# Altium PCB auto_turn.PcbDoc
Units mil, origin at the board's own origin, x right, y up, seen from the top; angles counter-clockwise.
Board outline 3937.01 x 2362.2 mil, 2 copper layers (Top Layer, Bottom Layer); 127 components, 77 nets, 409 pads, 81 vias.
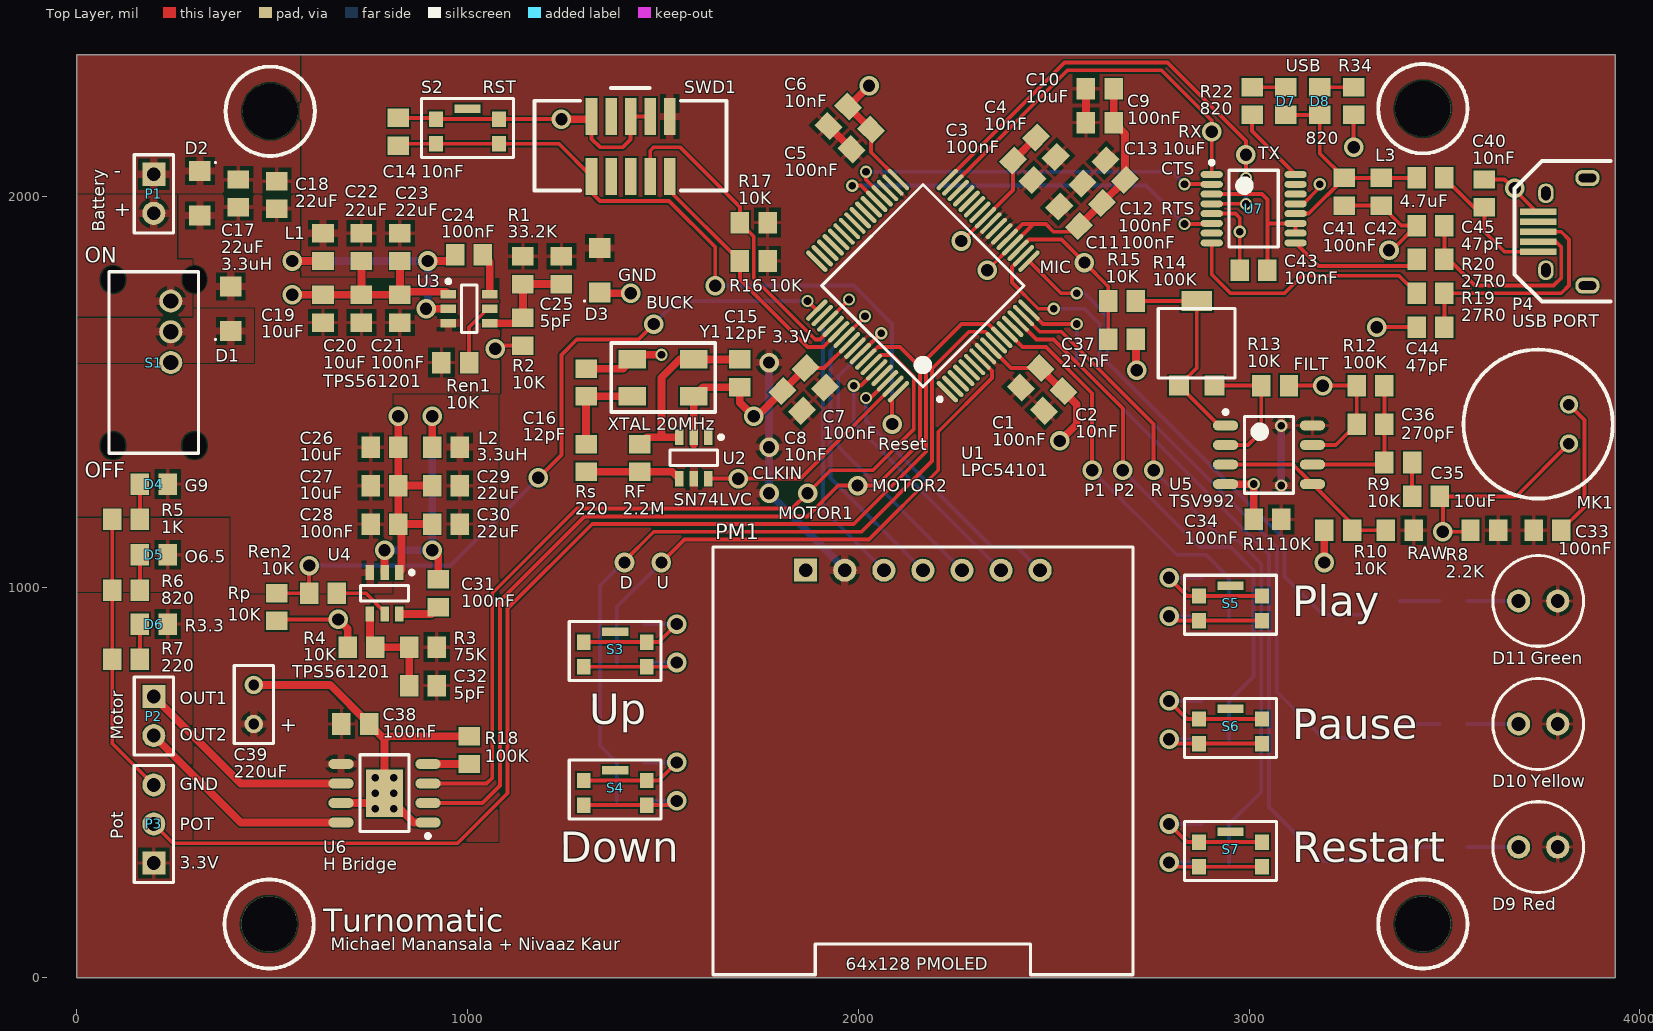
[diagram p0: Top Layer view]
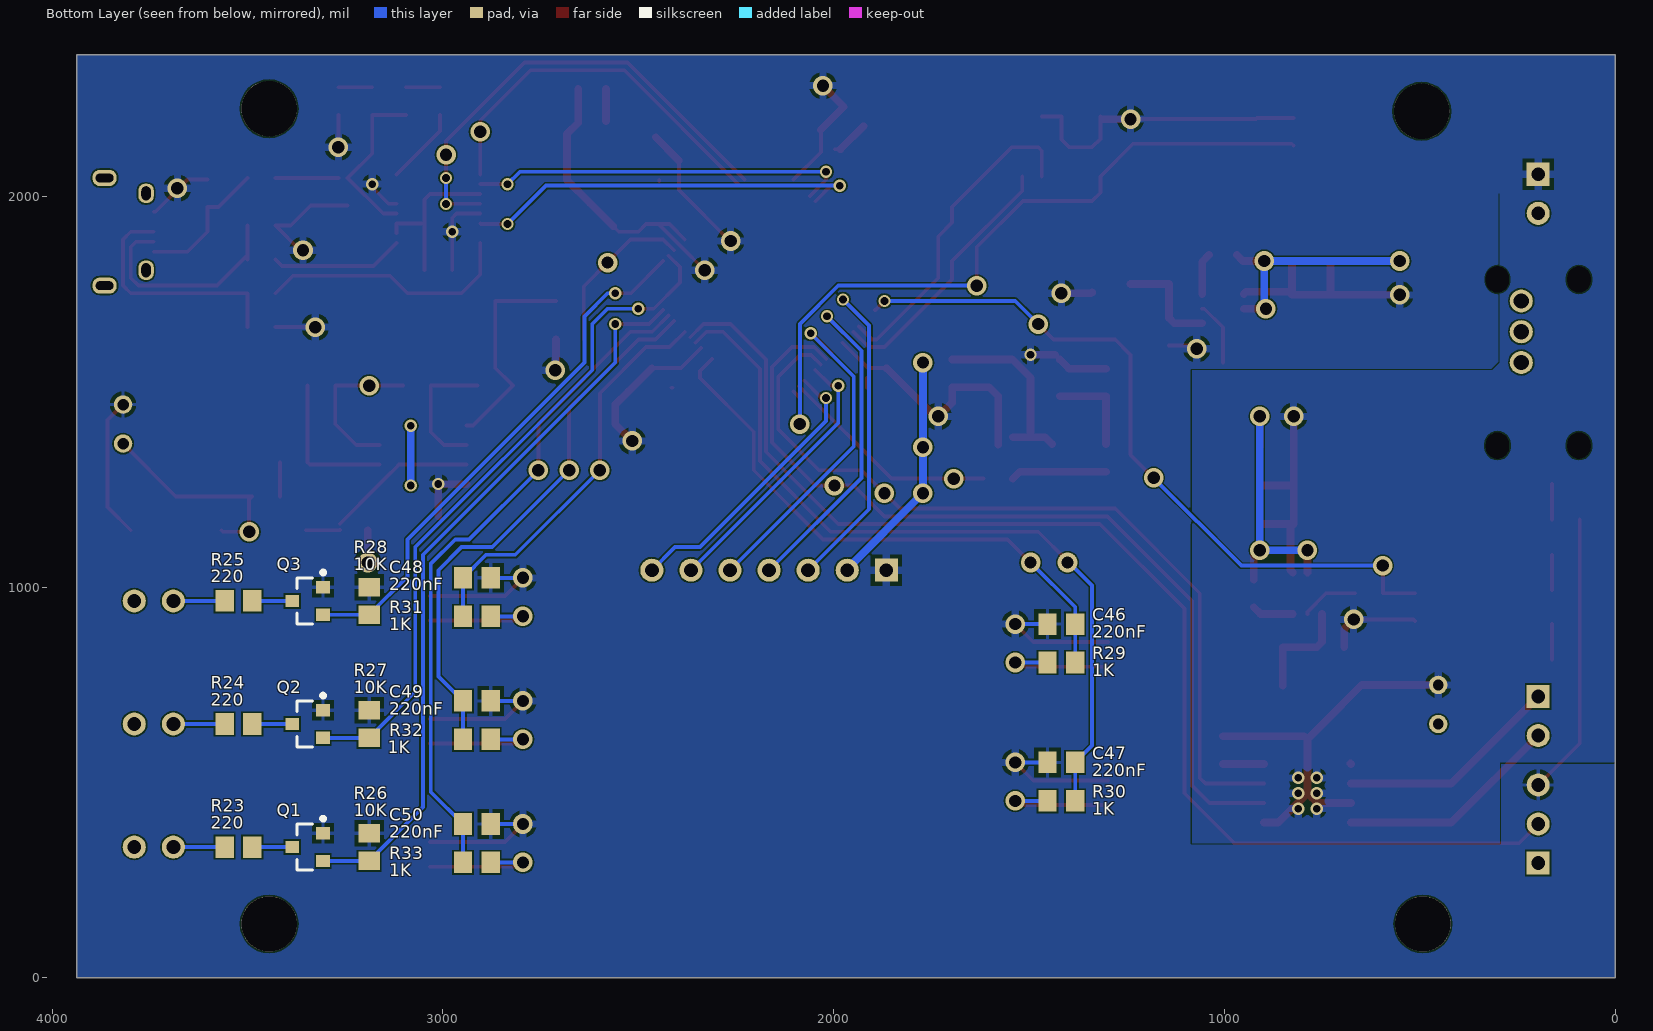
[diagram p1: Bottom Layer view, seen from below]
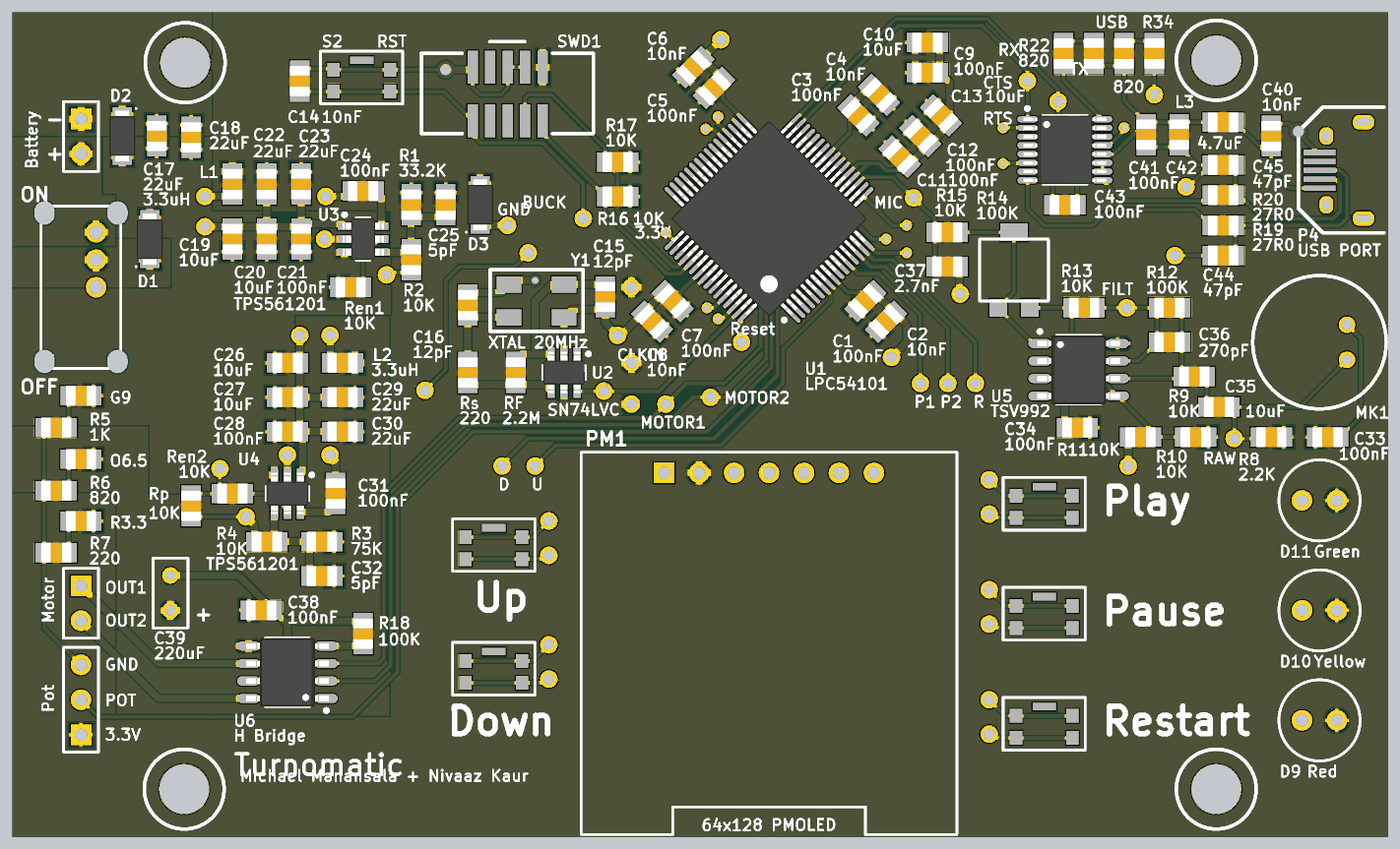
[diagram p2: 3D render of the assembled board from above, using the file's embedded part models]
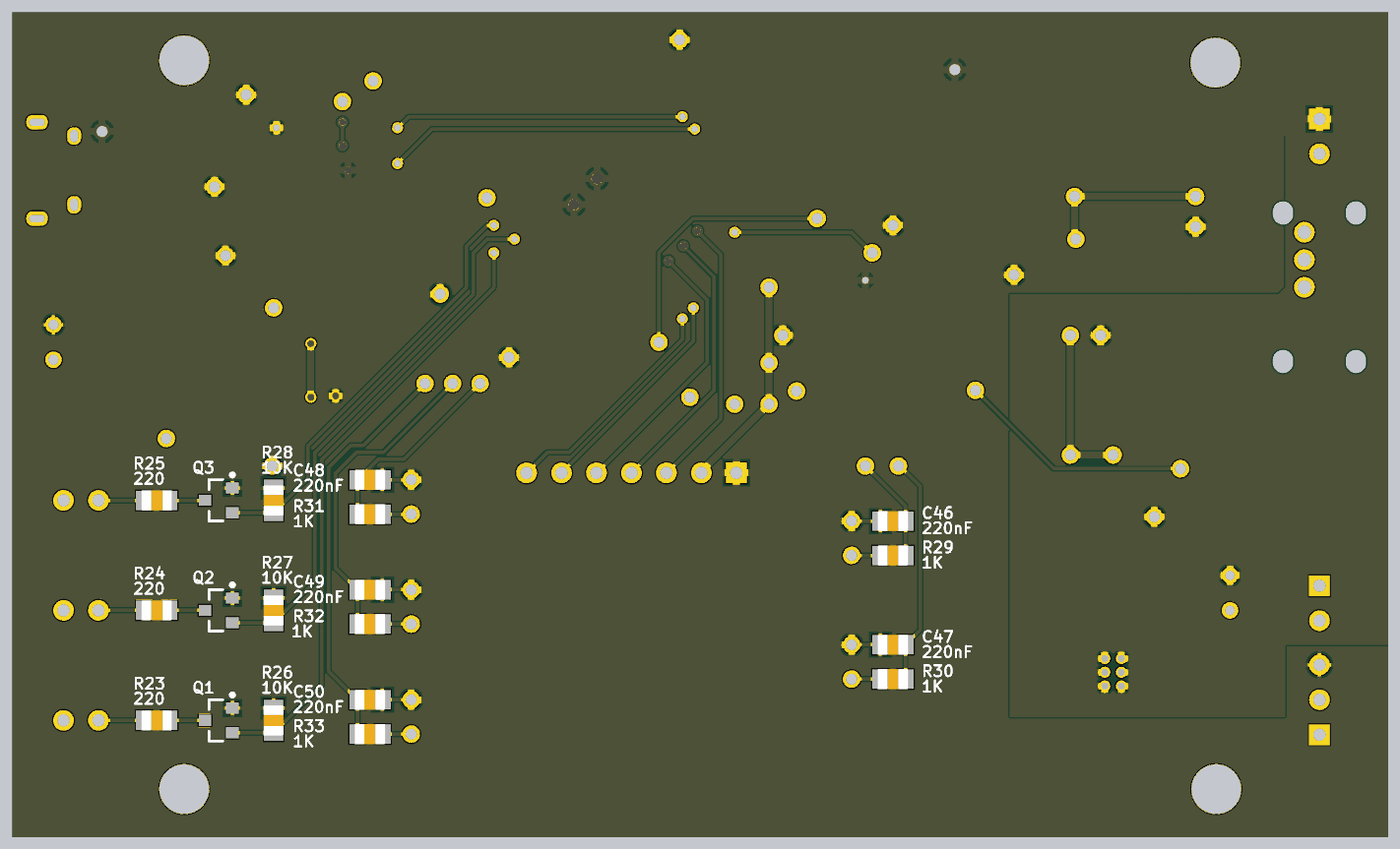
[diagram p3: 3D render of the assembled board from below, using the file's embedded part models]

## Layer stack, top to bottom
Top Solder: solder mask 0.4, Solder Resist, Dk 3.5
Top Layer: signal copper 1.4
Dielectric 1: dielectric 12.6, FR-4, Dk 4.8
Bottom Layer: signal copper 1.4
Bottom Solder: solder mask 0.4, Solder Resist, Dk 3.5

## Board outline
0,0 3937.01,0 3937.01,2362.2 0,2362.2

## Design rules (kind name [scope] priority, off if disabled: settings)
Clearance [All] p1: gap=3.94
HoleSize [All] p1: absolutevalues=TRUE maxlimit=196.85 minlimit=1 maxpercent=80.000 minpercent=20.000
MinimumSolderMaskSliver [All] p1: minsoldermaskwidth=0.2
PolygonConnect PolygonConnect_Power [HasFootprint('HDR1X2') OR HasFootprint('SOIC-8 PP') OR HasFootprint('DO219AB') OR HasFootprint('SOT236') OR InComponent('L*') OR HasFootprint('RAD-0.1') OR HasFootprint('MFS101D-8-Z') OR HasFootprint('ARM SWD connector') OR HasFootprint('PMOLED 128x64') or IsVia] p1: connectstyle=Relief reliefconductorwidth=19.68 reliefentries=4 polygonreliefangle="90 Angle" airgapwidth=9.84
PolygonConnect [All] p2: connectstyle=Relief reliefconductorwidth=9.84 reliefentries=4 polygonreliefangle="90 Angle" airgapwidth=9.84
RoomDefinition auto_turn [InComponentClass('auto_turn')] p1: confinementstyle=ConfineIn formatcopy=TRUE lockcomponents=FALSE outline 0,0 3937.01,0 3937.01,2362.2 0,2362.2
RoutingVias [All] p1: holewidth=31.5 width=50 viastyle="Through Hole" minholewidth=19.68 minwidth=31.5 maxholewidth=31.5 maxwidth=50
SilkToSilkClearance [All] p1: silktosilkclearance=3.94
SilkToSolderMaskClearance [IsPad] p1: minsilkscreentomaskgap=3.94 clearancetoexposedcopper=TRUE
SolderMaskExpansion [All] p1: expansion=4
Width Width_Power [InNet('GND') OR InNet('V3.3') OR InNet('V6.5') OR InNet('VIN') OR InNet('NetP1_2') OR InNet('NetD1_1')] p1: maxlimit=39.37 minlimit=9.84 preferedwidth=19.68
Width [All] p2: maxlimit=19.68 minlimit=9.84 preferedwidth=9.84
26 further rules are at their usual default settings.

## Components (designator, comment, footprint, x,y, rotation, side; value= is the part's Value field where it differs from the comment)
C1 "100nF" "0805 MD" 2440.94,1535.43 r225 top
C2 "10nF" "0805 MD" 2500,1476.38 r225 top
C3 "100nF" "0805 MD" 2421.26,2066.93 r315 top
C4 "10nF" "0805 MD" 2480.31,2125.98 r315 top
C5 "100nF" "0805 MD" 2007.87,2145.67 r225 top
C6 "10nF" "0805 MD" 1948.82,2204.72 r225 top
C7 "100nF" "0805 MD" 1889.76,1535.43 r315 top
C8 "10nF" "0805 MD" 1830.71,1476.38 r315 top
C9 "100nF" "0805 MD" 2618.11,2188.98 r180 top
C10 "10uF" "0805 MD" 2618.11,2275.59 r180 top
C11 "100nF" "0805 MD" 2539.37,1948.82 r135 top
C12 "100nF" "0805 MD" 2598.43,2007.87 r135 top
C13 "10uF" "0805 MD" 2657.48,2066.93 r135 top
C14 "10nF" "0805 MD" 822.83,2165.35 r270 top
C15 "12pF" "0805 MD" 1696.85,1547.24 r90 top
C16 "12pF" "0805 MD" 1303.15,1523.62 r270 top
C17 "22uF" "0805 MD" 413.39,2007.87 r270 top
C18 "22uF" "0805 MD" 511.81,2003.94 r270 top
C19 "10uF" "0805 MD" 629.92,1712.6 r270 top
C20 "10uF" "0805 MD" 728.35,1712.6 r270 top
C21 "100nF" "0805 MD" 826.77,1712.6 r270 top
C22 "22uF" "0805 MD" 728.35,1870.08 r90 top
C23 "22uF" "0805 MD" 826.77,1870.08 r90 top
C24 "100nF" "0805 MD" 1003.94,1850.39 r180 top
C25 "5pF" "0805 MD" 1240.16,1811.02 r270 top
C26 "10uF" "0805 MD" 787.4,1358.27 r180 top
C27 "10uF" "0805 MD" 787.4,1259.84 r180 top
C28 "100nF" "0805 MD" 787.4,1161.42 r180 top
C29 "22uF" "0805 MD" 944.88,1259.84 r0 top
C30 "22uF" "0805 MD" 944.88,1161.42 r0 top
C31 "100nF" "0805 MD" 925.2,984.25 r90 top
C32 "5pF" "0805 MD" 885.83,748.03 r180 top
C33 "100nF" "0805 MD" 3763.78,1145.67 r180 top
C34 "100nF" "0805 MD" 3047.24,1173.23 r0 top
C35 "10uF" "0805 MD" 3452.76,1232.28 r0 top
C36 "270pF" "0805 MD" 3311.02,1417.32 r0 top
C37 "2.7nF" "0805 MD" 2675.2,1633.86 r180 top
C38 "100nF" "0805 MD" 712.6,649.61 r180 top
C39 "220uF" RAD-0.1 452.76,699.61 r270 top
C40 "10nF" "0805 MD" 3602.36,2007.87 r270 top
C41 "100nF" "0805 MD" 3244.09,2011.81 r90 top
C42 "4.7uF" "0805 MD" 3338.58,2011.81 r90 top
C43 "100nF" "0805 MD" 3011.81,1811.02 r0 top
C44 "47pF" "0805 MD" 3464.57,1665.35 r0 top
C45 "47pF" "0805 MD" 3464.57,1925.2 r0 top
C46 "220nF" "0805 MD" 1417.32,905.51 r180 bottom
C47 "220nF" "0805 MD" 1417.32,551.18 r180 bottom
C48 "220nF" "0805 MD" 2913.39,1023.62 r0 bottom
C49 "220nF" "0805 MD" 2913.39,708.66 r0 bottom
C50 "220nF" "0805 MD" 2913.39,393.7 r0 bottom
D1 "D Schottky 0.4V" DO219AB 393.7,1712.6 r90 top
D2 "D Zener 16V" DO219AB 314.96,2007.87 r270 top
D3 "D Zener 3.9V" DO219AB 1338.58,1811.02 r90 top
D4 "G9" "0805 MD" 196.85,1263.78 r180 top
D5 "O6.5" "0805 MD" 196.85,1082.68 r180 top
D6 "R3.3" "0805 MD" 196.85,905.51 r180 top
D7 "Transfer" "0805 MD" 3094.49,2244.09 r90 top
D8 "USB" "0805 MD" 3181.1,2244.09 r90 top
D9 "Red" "5mm LED" 3740.16,334.65 r180 top
D10 "Yellow" "5mm LED" 3740.16,649.61 r180 top
D11 "Green" "5mm LED" 3740.16,964.57 r180 top
L1 "3.3uH" "0805 MD" 629.92,1870.08 r270 top
L2 "3.3uH" "0805 MD" 944.88,1358.27 r180 top
L3 "Ferrite Bead" "0805 MD" 3464.57,2047.24 r180 top
MK1 "Mic" CMA-4544PF-W 3740.16,1417.32 r0 top
P1 "Battery" HDR1X2 196.85,2056.69 r270 top
P2 "Motor" HDR1X2 196.85,720.08 r270 top
P3 "Pot" HDR1X3 196.85,293.7 r90 top
P4 "USB PORT" "USB Micro B" 3759.84,1960.63 r90 top
PM1 "64x128 PMOLED" "PMOLED 128x64" 2165.35,1043.31 r0 top
Q1 "MOSFET-N" SOT23 3346.46,334.65 r0 bottom
Q2 "MOSFET-N" SOT23 3346.46,649.61 r0 bottom
Q3 "MOSFET-N" SOT23 3346.46,964.57 r0 bottom
R1 "33.2K" "0805 MD" 1141.73,1811.02 r90 top
R2 "10K" "0805 MD" 1141.73,1653.54 r90 top
R3 "75K" "0805 MD" 885.83,846.46 r0 top
R4 "10K" "0805 MD" 728.35,846.46 r0 top
R5 "1K" "0805 MD" 125.98,1173.23 r180 top
R6 "820" "0805 MD" 125.98,992.13 r0 top
R7 "220" "0805 MD" 125.98,814.96 r0 top
R8 "2.2K" "0805 MD" 3602.36,1145.67 r0 top
R9 "10K" "0805 MD" 3381.89,1318.9 r180 top
R10 "10K" "0805 MD" 3385.83,1145.67 r0 top
R11 "10K" "0805 MD" 3228.35,1145.67 r0 top
R12 "100K" "0805 MD" 3311.02,1515.75 r180 top
R13 "10K" "0805 MD" 3066.93,1515.75 r180 top
R14 "100K" "Trimmer 23B" 2866.14,1624.02 r270 top
R15 "10K" "0805 MD" 2675.2,1732.28 r180 top
R16 "10K" "0805 MD" 1732.28,1834.65 r0 top
R17 "10K" "0805 MD" 1732.28,1933.07 r0 top
R18 "100K" "0805 MD" 1003.94,582.68 r270 top
R19 "27R0" "0805 MD" 3464.57,1751.97 r0 top
R20 "27R0" "0805 MD" 3464.57,1838.58 r0 top
R22 "820" "0805 MD" 3007.87,2244.09 r270 top
R23 "220" "0805 MD" 3523.62,334.65 r0 bottom
R24 "220" "0805 MD" 3523.62,649.61 r0 bottom
R25 "220" "0805 MD" 3523.62,964.57 r0 bottom
R26 "10K" "0805 MD" 3188.98,334.65 r270 bottom
R27 "10K" "0805 MD" 3188.98,649.61 r270 bottom
R28 "10K" "0805 MD" 3188.98,964.57 r270 bottom
R29 "1K" "0805 MD" 1417.32,807.09 r0 bottom
R30 "1K" "0805 MD" 1417.32,452.76 r0 bottom
R31 "1K" "0805 MD" 2913.39,925.2 r180 bottom
R32 "1K" "0805 MD" 2913.39,610.24 r180 bottom
R33 "1K" "0805 MD" 2913.39,295.28 r180 bottom
R34 "820" "0805 MD" 3267.72,2244.09 r90 top
Ren1 "10K" "0805 MD" 968.5,1574.8 r180 top
Ren2 "10K" "0805 MD" 629.92,984.25 r180 top
RF "2.2M" "0805 MD" 1440.94,1330.71 r270 top
Rp "10K" "0805 MD" 511.81,948.82 r90 top
Rs "220" "0805 MD" 1303.15,1330.71 r270 top
S1 "SW-SPDT" MFS101D-8-Z 196.85,1574.8 r270 top
S2 "RST" "Pushbutton KMR2" 919.29,2134.84 r0 top
S3 "Up" "Pushbutton KMR2" 1297.24,796.26 r0 top
S4 "Down" "Pushbutton KMR2" 1297.24,441.93 r0 top
S5 "Play" "Pushbutton KMR2" 2872.05,914.37 r0 top
S6 "Pause" "Pushbutton KMR2" 2872.05,599.41 r0 top
S7 "Restart" "Pushbutton KMR2" 2872.05,284.45 r0 top
SWD1 "Debug connector" "ARM SWD connector" 1517.32,2204.72 r180 top
U1 "LPC54101" LQFP64 2165.35,1771.65 r135 top
U2 "SN74LVC" SOT236 1578.74,1330.71 r270 top
U3 "TPS561201" SOT236 1003.94,1712.6 r0 top
U4 "TPS561201" SOT236 787.4,984.25 r270 top
U5 "TSV992" SOIC-8 3051.18,1338.58 r0 top
U6 "H Bridge" "SOIC-8 PP" 787.4,472.44 r180 top
U7 "FT230X" "SSOP-16 FTDI" 3011.81,1968.5 r0 top
Y1 "XTAL 20MHz" "SMD XTAL 4Pin" 1578.74,1488.19 r180 top

## Footprints (in the part's own frame and the unit in brackets; to place one, negate y for a bottom-side part, rotate by r counter-clockwise, add the part's x,y. Pads: shape width x height; smd on the part's side, far side on the other; paste and mask are expansions set on the pad)
"5mm LED" [mm] "5mm LED"
  round 1.5 hole 0.9: 1(-1.27,0) 2(1.27,0)
  silkscreen extent -2.95,-2.95 2.95,2.95
"0805 MD" [mm] "0805 imperial Capacitor medium density"
  rect 1.2x1.4 smd: 1(-0.9,0) 2(0.9,0)
  body extent -1.11,-0.73 1.11,0.73, height 1.4
"ARM SWD connector" [mm] "1.27mm pitch, 10 poles, 2 rows, SMD"
  rect 0.76x2.4 smd: 1(0,0) 2(0,3.9) 3(1.27,0) 4(1.27,3.9) 5(2.54,0) 6(2.54,3.9) 7(3.81,0) 8(3.81,3.9) 9(5.08,0) 10(5.08,3.9)
  silkscreen extent -3.68,-1.85 8.8,4.83
CMA-4544PF-W [mm] "Electret Condensor Microphone"
  round 1.2 hole 0.75: 1(2,1.27) 2(2,-1.27)
  silkscreen extent -4.85,-4.85 4.85,4.85
DO219AB [mm] "SODFL, 2-Leads, Body 1.80x3.70mm, IPC Medium Density"
  rect 1.3x1.4 smd: 1(-1.45,0) 2(1.45,0)
  silkscreen extent -2.05,0.95 -1.95,1.05, body extent -1.85,-0.95 1.85,0.95, height 1.08
HDR1X2 [mm] "Connector; Header; 2 Position"
  rect 1.5x1.5 hole 0.9: 1(0,0)
  round 1.5 hole 0.9: 2(2.54,0)
  silkscreen extent -1.27,-1.27 3.81,1.27
HDR1X3 [mm] "Connector; Header; 3 Position"
  rect 1.5x1.5 hole 0.9: 1(0,0)
  round 1.5 hole 0.9: 2(2.54,0) 3(5.08,0)
  silkscreen extent -1.27,-1.27 6.35,1.27
LQFP64 [mm] "LQFP64 from NXP datasheet long lead"
  oval 1.85x0.29 smd: 1(-6,3.75) 2(-6,3.25) 3(-6,2.75) 4(-6,2.25) 5(-6,1.75) 6(-6,1.25) 7(-6,0.75) 8(-6,0.25) 9(-6,-0.25) 10(-6,-0.75) 11(-6,-1.25) 12(-6,-1.75) 13(-6,-2.25) 14(-6,-2.75) 15(-6,-3.25) 16(-6,-3.75) 33(6,-3.75) 34(6,-3.25) 35(6,-2.75) 36(6,-2.25) 37(6,-1.75) 38(6,-1.25) 39(6,-0.75) 40(6,-0.25) 41(6,0.25) 42(6,0.75) 43(6,1.25) 44(6,1.75) 45(6,2.25) 46(6,2.75) 47(6,3.25) 48(6,3.75)
  oval 0.29x1.85 smd: 17(-3.75,-6) 18(-3.25,-6) 19(-2.75,-6) 20(-2.25,-6) 21(-1.75,-6) 22(-1.25,-6) 23(-0.75,-6) 24(-0.25,-6) 25(0.25,-6) 26(0.75,-6) 27(1.25,-6) 28(1.75,-6) 29(2.25,-6) 30(2.75,-6) 31(3.25,-6) 32(3.75,-6) 49(3.75,6) 50(3.25,6) 51(2.75,6) 52(2.25,6) 53(1.75,6) 54(1.25,6) 55(0.75,6) 56(0.25,6) 57(-0.25,6) 58(-0.75,6) 59(-1.25,6) 60(-1.75,6) 61(-2.25,6) 62(-2.75,6) 63(-3.25,6) 64(-3.75,6)
  silkscreen extent -6.12,-4.65 4.65,4.65, body extent -6.08,-6.08 6.08,6.08, height 1.6
MFS101D-8-Z [mm] "Copal Electronics Inc. MFS101D-8-Z"
  round 1.5 hole 1: 1(-4,1.1) 2(-2,1.1) 3(0,1.1)
  round 0 hole 1.5 slot 1.7 at 0 deg unplated: H(-5.4,2.65) H(-5.4,-2.65) H(5.4,2.65) H(5.4,-2.65)
  silkscreen extent -5.9,-2.9 5.9,2.9
"PMOLED 128x64" [mm] "128x64 PMOLED"
  rect 1.5x1.5 hole 0.9: 1(-7.62,0)
  round 1.5 hole 0.9: 2(-5.08,0) 3(-2.54,0) 4(0,0) 5(2.54,0) 6(5.08,0) 7(7.62,0)
  silkscreen extent -13.65,-26.3 13.65,1.5
"Pushbutton KMR2" [mm] "KMR 2 micro switch"
  rect 0.9x1 smd: 1(0,1.6) 1(4.1,1.6) 2(0,0) 2(4.1,0)
  rect 1.7x0.55 smd: G(2.05,2.275)
  silkscreen extent -0.94,-0.89 5.03,2.95
RAD-0.1 [mm] "Radial Cap, Thru-Hole; 2 Leads; 0.1 in Pin Spacing"
  round 1.2 hole 0.7: 1(-1.27,0) 2(1.27,0)
  silkscreen extent -2.54,-1.27 2.54,1.27
"SMD XTAL 4Pin" [mm] "Abracon AB3MB SMD XTAL 4 pin"
  rect 1.8x1.2 smd: 1(0,-2.4) 2(4,-2.4) 3(4,0) 4(0,0)
  silkscreen extent -1.4,-3.48 5.36,1.02
SOIC-8 [mm] "SOIC-8 from TI datasheet"
  oval 1.65x0.65 smd: 1(-2.825,1.905) 2(-2.825,0.635) 3(-2.825,-0.635) 4(-2.825,-1.905) 5(2.825,-1.905) 6(2.825,-0.635) 7(2.825,0.635) 8(2.825,1.905)
  silkscreen extent -2.95,-2.5 1.6,2.9, body extent -3,-2.5 3,2.5, height 2.65
"SOIC-8 PP" [mm] "SOIC-8 with power pad from TI datasheet"
  oval 1.65x0.65 smd: 1(-2.825,1.905) 2(-2.825,0.635) 3(-2.825,-0.635) 4(-2.825,-1.905) 5(2.825,-1.905) 6(2.825,-0.635) 7(2.825,0.635) 8(2.825,1.905)
  rect 2.4x3.1 smd: 9(0,0)
  silkscreen extent -2.95,-2.5 1.6,2.9, body extent -3,-2.5 3,2.5, height 2.65
SOT23 [mm] "SOT23, 3-Leads, Body 2.90x2.40mm, Pitch 0.90mm, IPC Medium Density"
  rect 0.9x0.8 smd: 1(1,0) 2(-1,0.9) 3(-1,-0.9)
  silkscreen extent -1.12,-1.97 0.7,1.5, body extent -0.7,-1.5 0.7,1.5, height 1.1
SOT236 [mm] "SOT23, 6-Leads, Body 2.90x2.80mm, Pitch 0.95mm, IPC Medium Density"
  rect 1x0.55 smd: 1(-1.35,0.95) 2(-1.35,0) 3(-1.35,-0.95) 4(1.35,-0.95) 5(1.35,0) 6(1.35,0.95)
  silkscreen extent -1.47,-1.55 0.5,1.9, body extent -1.5,-1.53 1.5,1.53, height 1.45
"SSOP-16 FTDI" [mm] "SOP, 16-Leads, Body 4.90x3.90mm, Pitch 0.64mm, IPC Medium Density"
  oval 1.45x0.45 smd: 1(-2.725,2.222) 2(-2.725,1.587) 3(-2.725,0.953) 4(-2.725,0.318) 5(-2.725,-0.318) 6(-2.725,-0.953) 7(-2.725,-1.587) 8(-2.725,-2.222) 9(2.725,-2.222) 10(2.725,-1.587) 11(2.725,-0.953) 12(2.725,-0.318) 13(2.725,0.318) 14(2.725,0.953) 15(2.725,1.587) 16(2.725,2.222)
  silkscreen extent -2.85,-2.5 1.6,3.12, body extent -3,-2.5 3,2.5, height 1.75
"Trimmer 23B" [mm] "Trimmer Pot"
  rect 1.3x1.3 smd: 1(2.75,1.15) 3(2.75,-1.15)
  rect 1.3x2 smd: 2(-2.75,0)
  silkscreen extent -2.25,-2.5 2.25,2.5
"USB Micro B" [mm] "FCI 10118194"
  rect 0.4x2.35 smd: 1(-2.6,0.5) 2(-1.95,0.5) 3(-1.3,0.5) 4(-0.65,0.5) 5(0,0.5)
  rrect85% 1.05x1.55 hole 0.55 slot 1.15 at 90 deg: S(-4.8,-2.7) S(2.2,-2.7)
  rrect85% 1.25x1 hole 0.6 slot 0.9 at 0 deg: S(-3.8,0) S(1.2,0)
  silkscreen extent -5.84,-4.19 3.3,2.03

## Part data
C1 C2 C3 C4 C5 C6 C7 C8 C9 C10 C11 C12 C13 C14 C15 C16 C17 C18 C19 C20 C21 C22 C23 C24 C25 C26 C27 C28 C29 C30 C31 C32 C33 C34 C35 C36 C37 C38 C39 C40 C41 C42 C43 C44 C45 C46 C47 C48 C49 C50: library part Cap, "Capacitor"
D1: library part "D Schottky", "Schottky Diode"
D2 D3: library part "D Zener", "Zener Diode"
D4 D8 D11: library part LED1, "LED Green"
D5: library part LED1, "LED Orange"
D6 D9: library part LED1, "LED Red"
D7: library part LED1, "Green LED"
D10: library part LED1, "LED Yellow"
L1 L2 L3: library part Inductor, "Inductor"
MK1: library part Mic1, "Electret Microphone"
P1 P2: library part "Header 2", "Header, 2-Pin"
P3: library part "Header 3", "Header, 3-Pin"
P4: "USB port"
PM1: library part PMOLED, "Passive Matrix Organic LED Display"
Q1 Q2 Q3: "DMN2005K-7DICT-ND"
R1 R2 R3 R4 R5 R6 R7 R8 R9 R10 R11 R12 R13 R15 R16 R17 R18 R19 R20 R22 R23 R24 R25 R26 R27 R28 R29 R30 R31 R32 R33 R34 Ren1 Ren2 RF Rp Rs: library part Res1, "Resistor"
R14: library part RPot, "Potentiometer"
S2 S3 S4 S5 S6 S7: library part SW-PB, "Switch"
SWD1: "ARM 10 pin SWD connecttor"
U1: "LPC54101 uC 64 pin"
U2: library part SN74LVC1GX04, "Crystal Oscillator Driver IC SOT-23-6"
U3 U4: "Buck Regulator"
U5: "Dual Op Amp"
U6: library part DRV8871, "Half Bridge DC Motor Driver"
U7: "FT230X USB TO BASIC UART IC"
Y1: library part XTAL, "Crystal Oscillator"

## Free pads (board coordinates)
  round 141.73 hole 141.73: H(492.13,137.8) H(494.96,2217.89) H(3444.88,137.8) H(3444.88,2224.41)

## Via types
v1: diameter 50, hole 31.5, Top Layer to Bottom Layer, 50 vias
v2: diameter 31.5, hole 19.68, Top Layer to Bottom Layer, 20 vias
v3: diameter 31.5, hole 19.68, Top Layer to Bottom Layer, tented both sides, 7 vias
v4: diameter 50, hole 31.5, Top Layer to Bottom Layer, tented both sides, 4 vias

## Nets (pads, with @x,y where several pads share a name; then routed paths per layer and width w, separated by ;. In a path a pad name is that pad's centre, name@x,y a point inside that pad or via, vN(x,y) a via of type N, cw(c..) or ccw(c..) an arc to the next point about the centre after c; other vN are vias at no path point)
BUCK_EN: Ren2.2 Rp.2 U1.49 | length 1893
  Top Layer w9.84: Rp.2 Ren2.2 v1(594.49,1055.12) ; v1(1181.1,1279.53) 1240.16,1338.58 1240.16,1594.49 1279.53,1633.86 1437.01,1633.86 v1(1476.38,1673.23) ; v2(1870.08,1732.28) 1893.35,1709.02 U1.49
  Bottom Layer w9.84: v1(594.49,1055.12) 956.69,1055.12 v1(1181.1,1279.53) ; v1(1476.38,1673.23) 1535.43,1732.28 v2(1870.08,1732.28)
CLKIN: U1.63 U2.6 | length 570.7
  Top Layer w9.84: U2.6 v1(1692.91,1277.56) 1852.21,1277.56 U1.63
DOWN_BUTTON: C47.2 R30.1 U1.10 | length 2010.7
  Top Layer w9.84: v1(1401.57,1062.99) 1401.57,1066.93 1476.38,1141.73 2007.87,1141.73 2188.98,1322.83 2188.98,1559.06 2283.46,1653.54 2325.22,1653.54 U1.10
  Bottom Layer w9.84: R30.1 C47.2 1338.58,594.49 1338.58,1003.94 1401.57,1066.93 v1(1401.57,1062.99)
GND: C1.1 C2.1 C3.1 C4.1 C5.1 C6.1 C7.1 C8.1 C9.1 C10.1 C11.1 C12.1 C13.1 C14.1 C15.1 C16.1 C17.1 C18.1 C19.1 C20.1 C21.1 C22.1 C23.1 C26.1 C27.1 C28.1 C29.1 C30.1 C33.1 C34.1 C37.1 C38.1 C39.1 C40.1 C41.1 C42.1 C43.1 C44.1 C45.1 C46.1 C47.1 C48.1 C49.1 C50.1 D2.1 D3.1 MK1.1 P1.1 P3.3 P4.5 PM1.1 Q1.3 Q2.3 Q3.3 R2.1 R4.1 R5.2 R6.1 R7.1 R11.1 R18.1 R26.1 R27.1 R28.1 R34.1 Rp.1 S2.1 S3.1 S4.1 S5.1 S6.1 S7.1 SWD1.3 SWD1.5 SWD1.9 U1.9 U1.20 U1.21 U1.25 U1.33 U1.55 U2.2 U3.1 U4.1 U5.4 U6.1 U6.7 U6.9 U7.5 U7.13 Y1.2 Y1.4 | length 10095
  Top Layer w9.84: R7.1@90.55,811.02 R5.2 ; R7.1 90.55,600 P3.3 ; Rp.1 515.75,917.32 v1(669.29,917.32) ; C14.1 916.34,2200.79 919.29,2197.83 1080.71,2197.83 v4@1236.22,2197.83 ; v1(1070.87,1610.24) 1078.74,1618.11 R2.1 ; S4.1@1297.24,504.92 1458.66,504.92 1489.17,504.92 v1(1535.43,551.18) ; S3.1@1297.24,859.25 1458.66,859.25 1489.17,859.25 v1(1535.43,905.51) ; SWD1.9@1310.43,2197.83 SWD1.9 1317.32,2147.24 1338.58,2125.98 1397.64,2125.98 1417.32,2145.67 SWD1.5 SWD1.3 ; C7.1 1912.43,1560.49 U1.55 ; C5.1 2032.93,2112.87 U1.33 ; v4@2261.8,1884 2263.78,1884 2396.2,2016.42 C3.1 ; v4(2330,1811.02) U1.20 2448.11,1929.13 ; U1.9 2390.44,1560.49 C1.1 ; U1.21 2420.27,1929.13 2448.11,1929.13 ; C11.1 2550.11,1909.45 2500,1909.45 2480.31,1929.13 2448.11,1929.13 ; v1(2795.28,393.7) 2841.54,347.44 2872.05,347.44 S7.1@3033.46,347.44 ; v1(2795.28,708.66) 2841.54,662.4 2872.05,662.4 S6.1@3033.46,662.4 ; v1(2795.28,1023.62) 2841.54,977.36 2872.05,977.36 S5.1@3033.46,977.36 ; U7.5 2965.26,1956 2976.38,1944.88 C43.1 ; U7.13 3138.83,1981 3181.1,2023.27 v2(3181.1,2031.5) ; C41.1 C42.1 3389.76,1925.2 C45.1 3366.14,1862.2 v1(3358.27,1862.2) ; v1(3267.72,2125.98) R34.1 ; v1(3326.77,1665.35) C44.1 ; C40.1 3653.54,2043.31 3736.22,1960.63 P4.5 ; C33.1 3858.27,1204.72 3858.27,1427.95 MK1.1
  Top Layer w19.68: C39.1 648.03,749.61 C38.1 787.4,610.24 ; v1(551.18,1748.03) C19.1 C20.1 ; v1(669.29,917.32) 692.91,893.7 R4.1 ; U6.7 762.4,447.44 U6.9@775.59,460.63 ; C22.1 C20.1 ; v1(822.83,1437.01) C26.1 C27.1 ; U4.1 830.71,1043.31 830.71,1153.54 C28.1 ; C23.1 C21.1 ; U6.1 862.4,397.44 U6.9 787.4,610.24 ; C30.1 C28.1 ; C29.1 C27.1 ; U3.1 944.88,1755.91 834.65,1755.91 C21.1 ; R18.1 795.28,618.11 787.4,610.24 ; v4(1240.16,2197.83) SWD1.9@1310.43,2197.83 ; C16.1 1397.64,1559.06 Y1.2 ; D3.1 1340.55,1751.97 v1(1417.32,1751.97) ; Y1.2@1433.07,1594.49 v3(1496.06,1594.49) ; 1578.74,1364.17 U2.2 Y1.4 1602.36,1511.81 C15.1 1696.85,1472.44 v1(1732.28,1437.01) 1741.23,1437.01 C8.1 C7.1 ; v1(2027.56,2283.46) C6.1 C5.1 ; C3.1 C4.1 ; C1.1 C2.1 2559.06,1467.43 2559.06,1417.32 v1(2515.75,1374.02) ; C11.1 C12.1 C13.1 2682.54,2159.98 C9.1 C10.1 ; C37.1 2710.63,1557.09 v1(2712.6,1555.12) ; U5.4 3011.61,1263.58 v2(3011.81,1263.78) C34.1@3011.81,1181.1 ; v1(3192.91,1062.99) R11.1 ; C20.1 C21.1 ; C28.1 C27.1
  Bottom Layer w9.84: C47.1 v1(1535.43,551.18) ; C46.1 v1(1535.43,905.51) ; v1(2795.28,393.7) C50.1 ; v1(2795.28,708.66) C49.1 ; v1(2795.28,1023.62) C48.1
  other v2: 763.78,433.07 811.02,433.07 763.78,472.44 811.02,472.44 763.78,511.81 811.02,511.81
  other v3: 2976.38,1909.45
  other v4: 2263.78,1885.83 3679.84,2020.63
LED_PAUSED: Q2.2 R27.2 U1.18 | length 1762.8
  Top Layer w9.84: U1.18 2393.7,1819.05 2393.7,1779.53 2460.63,1712.6 v2(2500,1712.6)
  Bottom Layer w9.84: v2(2500,1712.6) 2578.74,1712.6 2618.11,1673.23 2618.11,1555.12 3070.87,1102.36 3070.87,732.28 R27.2 Q2.2
LED_RUNNING: Q3.2 R28.2 U1.17 | length 1369.8
  Top Layer w9.84: U1.17 2519.11,1751.97 v2(2559.06,1751.97)
  Bottom Layer w9.84: v2(2559.06,1751.97) 2578.74,1751.97 2637.8,1692.91 2637.8,1574.8 3090.55,1122.05 3090.55,1027.56 R28.2 Q3.2
LED_STOPPED: Q1.2 R26.2 U1.16 | length 1890.1
  Top Layer w9.84: U1.16 2472.57,1673.23 v2(2559.06,1673.23)
  Bottom Layer w9.84: v2(2559.06,1673.23) 2559.06,1574.8 3051.18,1082.68 3051.18,437.01 R26.2 Q1.2
MIC_ADC: C37.2 R15.2 U1.19 | length 427.8
  Top Layer w9.84: U1.19 2436.58,1889.76 2519.69,1889.76 v1(2578.74,1830.71) 2639.76,1769.68 R15.2 C37.2
MOTOR_IN1: U1.59 U6.3 | length 2172.7
  Top Layer w9.84: U6.3 1048.62,497.44 1062.99,511.81 1062.99,984.25 1279.53,1200.79 1830.71,1200.79 v1(1870.08,1240.16) 1929.13,1299.21 2037.4,1299.21 2141.73,1403.54 2141.73,1539.37 2086.61,1594.49 2057.79,1594.49 U1.59
MOTOR_IN2: U1.58 U6.2 | length 2282.8
  Top Layer w9.84: U6.2 1037.99,447.44 1082.68,492.13 1082.68,964.57 1299.21,1181.1 1870.08,1181.1 1948.82,1259.84 v1(1998.03,1259.84) 2047.24,1259.84 2157.48,1370.08 2157.48,1562.99 2106.3,1614.17 2049.63,1614.17 U1.58
NetC15_2: C15.2 RF.1 U2.3 Y1.1 | length 479.7
  Top Layer w19.68: RF.1 1458.66,1383.86 1496.06,1383.86 ; U2.3 1496.06,1383.86 ; C15.2 Y1.1 1543.31,1582.68 1496.06,1535.43 1496.06,1383.86
NetC16_2: C16.2 Rs.1 Y1.3 | length 240.2
  Top Layer w19.68: Rs.1 C16.2 Y1.3
NetC24_1: C24.1 U3.6 | length 107.7
  Top Layer w19.68: C24.1 1057.09,1832.68 U3.6
NetC24_2: C24.2 L1.2 U3.2 | length 683.4
  Top Layer w19.68: v1(551.18,1834.65) L1.2 ; v1(893.7,1712.6) U3.2 ; v1(897.64,1834.65) 952.76,1834.65 C24.2
  Bottom Layer w19.68: v1(551.18,1834.65) v1(897.64,1834.65) 897.64,1716.54 v1(893.7,1712.6)
NetC25_2: C25.2 R1.1 R2.2 U3.4 | length 275.4
  Top Layer w19.68: U3.4 1127.95,1675.2 R2.2 R1.1 C25.2
NetC31_1: C31.1 U4.6 | length 107.7
  Top Layer w19.68: U4.6 907.48,931.1 C31.1
NetC31_2: C31.2 L2.2 U4.2 | length 681.7
  Top Layer w19.68: U4.2 v1(787.4,1094.49) ; v1(909.45,1094.49) 925.2,1078.74 C31.2 ; L2.2 v1(909.45,1437.01)
  Bottom Layer w19.68: v1(787.4,1094.49) v1(909.45,1094.49) v1(909.45,1437.01)
NetC32_2: C32.2 R3.1 R4.2 U4.4 | length 275.4
  Top Layer w19.68: U4.4 750,860.24 R4.2 R3.1 C32.2
NetC35_1: C35.1 R9.1 | length 86.6
  Top Layer w9.84: C35.1 R9.1
NetC35_2: C35.2 MK1.2 R8.1 | length 553
  Top Layer w9.84: R8.1 3562.99,1141.73 v1(3496.06,1141.73) 3496.06,1224.41 C35.2 3683.86,1232.28 MK1.2
NetC36_1: C36.1 R12.2 R13.1 U5.7 | length 407.1
  Top Layer w9.84: R13.1 v1(3188.98,1515.75) R12.2 C36.1 3221.85,1363.58 U5.7
NetC36_2: C36.2 R9.2 R12.1 U5.6 | length 383.1
  Top Layer w9.84: U5.6 3341.14,1313.58 R9.2 C36.2 R12.1
NetC40_2: C40.2 L3.1 P4.1 | length 355.3
  Top Layer w9.84: L3.1 3574.8,1972.44 C40.2 3602.36,1909.45 3653.54,1858.27 P4.1
NetC41_2: C41.2 C42.2 D7.1 D8.1 L3.2 U7.12 | length 598.3
  Top Layer w9.84: D7.1 D8.1 3181.1,2110.24 C41.2 3152.85,1956 U7.12 ; C41.2@3267.72,2047.24 C42.2 L3.2
NetC43_2: C43.2 U7.3 U7.10 U7.11 | length 427.3
  Top Layer w9.84: U7.3 3033.37,2006 3047.24,1992.13 3047.24,1933.07 ; C43.2 3047.24,1933.07 ; U7.10 U7.11 3049.31,1931 3047.24,1933.07
NetD1_1: D1.1 S1.2
NetD4_2: D4.2 R5.1 | length 90.6
  Top Layer w9.84: R5.1 D4.2
NetD5_2: D5.2 R6.2 | length 90.6
  Top Layer w9.84: R6.2 D5.2
NetD6_2: D6.2 R7.2 | length 90.6
  Top Layer w9.84: R7.2 D6.2
NetD7_2: D7.2 R22.1 | length 86.6
  Top Layer w9.84: R22.1 D7.2
NetD8_2: D8.2 R34.2 | length 86.6
  Top Layer w9.84: D8.2 R34.2
NetD9_2: D9.2 R23.2 | length 131.1
  Bottom Layer w9.84: R23.2 D9.2
NetD10_2: D10.2 R24.2 | length 131.1
  Bottom Layer w9.84: R24.2 D10.2
NetD11_2: D11.2 R25.2 | length 131.1
  Bottom Layer w9.84: R25.2 D11.2
NetP1_2: P1.2 S1.1
NetP2_1: P2.1 U6.6 | length 571.6
  Top Layer w19.68: P2.1 419.49,497.44 U6.6
NetP2_2: P2.2 U6.8 | length 571.6
  Top Layer w19.68: P2.2 419.49,397.44 U6.8
NetQ1_1: Q1.1 R23.1 | length 102.4
  Bottom Layer w9.84: Q1.1 R23.1
NetQ2_1: Q2.1 R24.1 | length 102.4
  Bottom Layer w9.84: Q2.1 R24.1
NetQ3_1: Q3.1 R25.1 | length 102.4
  Bottom Layer w9.84: Q3.1 R25.1
NetR10_1: R10.1 R11.2 U5.3 U5.5 | length 474.1
  Top Layer w9.84: U5.3 3112.4,1313.58 3121.06,1304.92 3121.06,1304.61 3133.75,1291.93 3134.06,1291.93 U5.5 R11.2@3263.78,1162.2 ; R11.2@3263.78,1146.46 R11.2 R10.1
NetR13_2: R13.2 R14.1 U5.2 | length 343.8
  Top Layer w9.84: R14.1 R13.2 3031.5,1397.64 2997.44,1363.58 U5.2
NetR14_2: R14.2 R14.3 R15.1 U5.1 | length 552.2
  Top Layer w9.84: R15.1 R14.2 2866.14,1712.6 2866.14,1561.02 R14.3 2923.03,1413.58 U5.1
NetR18_2: R18.2 U6.4 | length 105.4
  Top Layer w9.84: R18.2@1003.74,547.44 R18.2
  Top Layer w19.68: U6.4 R18.2@1003.74,547.44
NetR19_1: R19.1 U7.8 | length 662.7
  Top Layer w9.84: U7.8 2904.53,1800.2 2952.76,1751.97 3090.55,1751.97 3135.53,1796.95 3384.15,1796.95 R19.1
NetR20_1: R20.1 U7.9 | length 341.4
  Top Layer w9.84: U7.9 3178.15,1821.95 3412.5,1821.95 R20.1
NetR29_2: R29.2 S3.2 | length 325.4
  Top Layer w9.84: S3.2@1297.24,796.26 1458.66,796.26 1524.61,796.26 v1(1535.43,807.09)
  Bottom Layer w9.84: R29.2 v1(1535.43,807.09)
NetR30_2: R30.2 S4.2 | length 325.4
  Top Layer w9.84: S4.2@1297.24,441.93 1458.66,441.93 1524.61,441.93 v1(1535.43,452.76)
  Bottom Layer w9.84: R30.2 v1(1535.43,452.76)
NetR31_2: R31.2 S5.2 | length 325.4
  Top Layer w9.84: v1(2795.28,925.2) 2806.1,914.37 2872.05,914.37 S5.2@3033.46,914.37
  Bottom Layer w9.84: v1(2795.28,925.2) R31.2
NetR32_2: R32.2 S6.2 | length 325.4
  Top Layer w9.84: v1(2795.28,610.24) 2806.1,599.41 2872.05,599.41 S6.2@3033.46,599.41
  Bottom Layer w9.84: v1(2795.28,610.24) R32.2
NetR33_2: R33.2 S7.2 | length 325.4
  Top Layer w9.84: v1(2795.28,295.28) 2806.1,284.45 2872.05,284.45 S7.2@3033.46,284.45
  Bottom Layer w9.84: v1(2795.28,295.28) R33.2
NetRen1_1: Ren1.1 U3.5 | length 163.1
  Top Layer w9.84: Ren1.1 1003.94,1665.09 1051.45,1712.6 U3.5
NetRen2_1: Ren2.1 U4.5 | length 147.4
  Top Layer w9.84: Ren2.1 739.89,984.25 787.4,936.74 U4.5
NetRF_2: RF.2 Rs.2 U2.4 | length 245.5
  Top Layer w19.68: Rs.2 RF.2 1523.62,1295.28 U2.4
PAUSE_BUTTON: C49.2 R32.1 U1.14 | length 1418.5
  Top Layer w9.84: U1.14 2456.26,1633.86 2500,1633.86 2618.11,1515.75 2677.17,1456.69 v1(2677.17,1299.21)
  Bottom Layer w9.84: v1(2677.17,1299.21) 2874.02,1102.36 2952.76,1102.36 3011.81,1043.31 3011.81,771.65 C49.2 R32.1
PLAY_BUTTON: C48.2 R31.1 U1.12 | length 1042.3
  Top Layer w9.84: U1.12 2420.27,1614.17 2480.31,1614.17 2598.43,1496.06 v1(2598.43,1299.21)
  Bottom Layer w9.84: v1(2598.43,1299.21) 2814.96,1082.68 2889.76,1082.68 C48.2 R31.1
POT_ADC: P3.2 U1.11 | length 3170.2
  Top Layer w9.84: P3.2 246.06,344.49 974.41,344.49 1102.36,472.44 1102.36,944.88 1318.9,1161.42 1988.19,1161.42 2173.23,1346.46 2173.23,1582.68 2263.78,1673.23 2333.38,1673.23 U1.11
RESET: C14.2 S2.2 SWD1.10 U1.64 | length 1884.6
  Top Layer w9.84: C14.2 827.76,2134.84 919.29,2134.84 1080.71,2134.84 1233.66,2134.84 SWD1.10 1317.32,2009.45 1338.58,1988.19 1515.75,1988.19 1633.86,1870.08 v1(1633.86,1771.65) ; v1(2086.61,1417.32) 2086.61,1484.12 U1.64
  Bottom Layer w9.84: v1(1633.86,1771.65) 1988.19,1771.65 2086.61,1673.23 v1(2086.61,1417.32)
RESTART_BUTTON: C50.2 R33.1 U1.15 | length 1739.3
  Top Layer w9.84: U1.15 2464.42,1653.54 2519.69,1653.54 2755.91,1417.32 v1(2755.91,1299.21)
  Bottom Layer w9.84: v1(2755.91,1299.21) 2933.07,1122.05 2968.5,1122.05 3031.5,1059.06 3031.5,476.38 C50.2 R33.1
SPI_CLK: PM1.3 U1.51 | length 862.9
  Top Layer w9.84: U1.51 1976.38,1735.79 v3(1976.38,1736.22)
  Bottom Layer w9.84: v3(1976.38,1736.22) 1909.45,1669.29 1909.45,1199.21 PM1.3
SPI_CS: PM1.7 U1.62 | length 736.2
  Top Layer w9.84: v2(2019.69,1484.25) 2031.07,1484.25 U1.62
  Bottom Layer w9.84: v2(2019.69,1484.25) 2019.69,1425.2 2342.52,1102.36 2406.3,1102.36 PM1.7
SPI_DC: PM1.6 U1.60 | length 704.2
  Top Layer w9.84: v2(1988.19,1515.75) 2006.88,1515.75 U1.60
  Bottom Layer w9.84: v2(1988.19,1515.75) 1988.19,1420.47 PM1.6
SPI_MOSI: PM1.4 U1.54 | length 859.5
  Top Layer w9.84: U1.54 v3(2017.02,1692.91)
  Bottom Layer w9.84: v3(2017.02,1692.91) 1929.13,1605.03 1929.13,1279.53 PM1.4
SPI_RES: PM1.5 U1.57 | length 861
  Top Layer w9.84: U1.57 2059.06,1651.43 v3(2059.06,1649.61)
  Bottom Layer w9.84: v3(2059.06,1649.61) 1948.82,1539.37 1948.82,1359.84 PM1.5
SWCLK: R17.1 SWD1.4 U1.52 | length 840.9
  Top Layer w9.84: SWD1.4 1467.32,2116.93 1476.38,2125.98 1543.31,2125.98 1696.85,1972.44 R17.1 1732.28,1897.64 1732.28,1791.34 1889.76,1633.86 1902.28,1633.86 U1.52
SWDIO: R16.1 SWD1.2 U1.53 | length 678.9
  Top Layer w9.84: SWD1.2 1517.32,2014.17 R16.1 1696.85,1787.4 1870.08,1614.17 1910.44,1614.17 U1.53
UART0_CTS: U1.36 U7.2 | length 976.9
  Top Layer w9.84: v2(2019.69,2062.99) 2019.69,2042.6 U1.36 ; v2(2834.65,2031.5) 2904.04,2031.5 U7.2
  Bottom Layer w9.84: v2(2019.69,2062.99) 2803.15,2062.99 v2(2834.65,2031.5)
UART0_RTS: U1.37 U7.6 | length 1041.2
  Top Layer w9.84: v2(1984.25,2027.56) 2006.88,2027.56 U1.37 ; v2(2834.65,1929.13) 2902.66,1929.13 U7.6
  Bottom Layer w9.84: v2(1984.25,2027.56) 2736.22,2027.56 v2(2834.65,1929.13)
UART0_RX: U1.31 U7.1 | length 975.6
  Top Layer w9.84: U1.31 2535.58,2322.83 2775.59,2322.83 2904.53,2193.9 v1(2904.53,2165.35) U7.1
UART0_TX: U1.32 U7.4 | length 1240.4
  Top Layer w9.84: U1.32 2527.43,2342.52 2791.34,2342.52 2992.13,2141.73 v1(2992.13,2106.3) v3(2992.13,2047.24) ; U7.4 2999.31,1981 2998.62,1980.32 v3(2992.13,1980.32)
  Bottom Layer w9.84: v3(2992.13,1980.32) 2992.13,2034.25 2998.62,2040.75 v3(2992.13,2047.24)
UP_BUTTON: C46.2 R29.1 U1.7 | length 1464.2
  Top Layer w9.84: v1(1496.06,1062.99) 1555.12,1122.05 2027.56,1122.05 2204.72,1299.21 2204.72,1397.64 2342.52,1535.43 2342.52,1552.73 U1.7
  Bottom Layer w9.84: R29.1 C46.2 1381.89,948.82 v1(1496.06,1062.99)
USB_ACTIVITY: R22.2 U7.16 | length 198.7
  Top Layer w9.84: R22.2 3007.87,2167.22 U7.16
USB_DM: C45.2 P4.2 R20.2 | length 570.1
  Top Layer w9.84: R20.2 R20.2@3500,1850.39 ; C45.2 R20.2@3500,1850.39 ; P4.2 3785.43,1883.86 3799.21,1870.08 3799.21,1791.34 3779.53,1771.65 3578.74,1771.65 R20.2@3500,1850.39
USB_DP: C44.2 P4.3 R19.2 | length 618.7
  Top Layer w9.84: C44.2 R19.2 3799.21,1751.97 3818.9,1771.65 3818.9,1889.76 3799.21,1909.45 P4.3
V3.3: C1.2 C2.2 C3.2 C4.2 C5.2 C6.2 C7.2 C8.2 C9.2 C10.2 C11.2 C12.2 C13.2 C22.2 C23.2 C25.1 C33.2 C34.2 D3.2 D6.1 D9.1 D10.1 D11.1 L1.1 P3.1 PM1.2 R1.2 R8.2 R10.2 R16.2 R17.2 SWD1.1 U1.8 U1.22 U1.23 U1.24 U1.34 U1.56 U2.5 U5.8 | length 977
  Top Layer w9.84: C7.2 C7.2@1914.82,1535.04 ; C5.2 C5.2@1997.35,2120.61 ; C1.2@2412.71,1510.38 C1.2 ; C3.2@2446.31,2038.69 C3.2
  Top Layer w19.68: C6.2 C5.2 ; C9.2@2582.68,2192.91 C10.2
  Bottom Layer w19.68: v1(1771.65,1574.8) v1(1771.65,1358.27) v1(1771.65,1240.16) 1965.35,1046.46 PM1.2 ; v2(3082.68,1259.84) v2(3082.68,1413.39)
V6.5: C29.2 C30.2 C32.1 C38.2 C39.2 D5.1 L2.1 R3.2 U6.5 | length 1.4
  Top Layer w19.68: U6.5 U6.5@677.17,548.43
VIN: C17.2 C18.2 C19.2 C20.2 C21.2 C26.2 C27.2 C28.2 D1.2 D2.2 D4.1 Ren1.2 U3.3 U4.3
pads on no net: P4.4 P4.S S1.3 S1.H S2.G S3.G S4.G S5.G S6.G S7.G SWD1.6 SWD1.7 SWD1.8 U1.1 U1.2 U1.3 U1.4 U1.5 U1.6 U1.13 U1.26 U1.27 U1.28 U1.29 U1.30 U1.35 U1.38 U1.39 U1.40 U1.41 U1.42 U1.43 U1.44 U1.45 U1.46 U1.47 U1.48 U1.50 U1.61 U2.1 U7.7 U7.14 U7.15

## Polygon pours and split planes (outlines as drawn)
VIN on Top Layer "VIN_L01_P021" (solid, pour order 21): 255.91,2007.87 570.87,2007.87 570.87,1791.34 1082.68,1791.34 1082.68,1496.06 807.09,1496.06 807.09,984.25 393.7,984.25 393.7,1181.1 0,1181.1 0,1574.8 452.76,1574.8 452.76,1712.6 295.28,1712.6 295.28,1838.58 255.91,1838.58
NetD1_1 on Top Layer "NETD1_1_L01_P017" (solid, pour order 17): 0,1692.91 299.21,1692.91 299.21,1712.6 452.76,1712.6 452.76,1574.8 0,1574.8
GND on Top Layer "GND_L01_P014" (solid, pour order 14): 0,2362.2 0,2007.87 570.87,2007.87 570.87,2362.2
V6.5 on Top Layer "V6.5_L01_P025" (solid, pour order 25): 0,1181.1 393.7,1181.1 393.7,984.25 807.09,984.25 807.09,1496.06 1082.68,1496.06 1082.68,344.49 295.28,344.49 295.28,984.25 0,984.25
NetP1_2 on Top Layer "NETP1_2_L01_P016" (solid, pour order 16): 0,1692.91 295.28,1692.91 295.28,1838.29 255.91,1838.58 255.91,2007.87 0,2007.87
V3.3 on Top Layer "V3.3_L01_P023" (solid, pour order 23): 1082.68,984.25 1082.68,1555.12 1082.68,1791.34 570.87,1791.34 570.87,2362.2 3937.01,2362.2 3937.01,0 1102.36,0 0,0 0,984.25 295.28,984.25 295.28,344.49 1082.68,344.49
GND on Bottom Layer "GND_L02_P031" (solid, pour order 31): 0,2007.87 393.7,2007.87 393.7,2362.2 0,2362.2 0,2007.87
GND on Bottom Layer "GND_L02_P027" (solid, pour order 27): 0,2362.2 295.28,2362.2 295.28,1574.8 314.96,1555.12 1082.68,1555.12 1082.68,344.49 295.28,344.49 295.28,551.18 0,551.18 0,2362.2
GND on Bottom Layer "GND_L02_P029" (solid, pour order 29): 295.28,2362.2 3937.01,2362.2 3937.01,0 0,0 0,551.18 295.28,551.18 295.28,344.49 1082.68,344.49 1082.68,1555.12 314.96,1555.12 295.28,1574.8 295.28,2007.87

## Silkscreen, mask and mechanical layers (free items; w line width, h text height)
Top Overlay:
  circle w10: c492.13,137.8 r114.17
  circle w10: c3444.88,137.8 r114.17
  circle w10: c494.96,2217.89 r114.17
  circle w10: c3444.88,2224.41 r114.17
  text "RX" at 2818.9,2149.61 h31.5
  text "TX" at 3023.62,2094.49 h31.5
  text "CTS" at 2775.59,2055.12 h31.5
  text "-" at 94.49,2047.24 h39.37
  text "RTS" at 2775.59,1952.76 h31.5
  text "+" at 94.49,1948.82 h39.37
  text "ON" at 19.68,1830.71 h39.37
  text "MIC" at 2464.57,1803.15 h31.5
  text "GND" at 1385.83,1783.46 h31.5
  text "BUCK" at 1456.69,1712.6 h31.5
  text "3.3V" at 1779.53,1625.98 h31.5
  text "FILT" at 3114.17,1555.12 h31.5
  text "Reset" at 2051.18,1350.39 h31.5
  text "OFF" at 19.68,1279.53 h39.37
  text "CLKIN" at 1728.35,1275.59 h31.5
  text "MOTOR2" at 2035.43,1244.09 h31.5
  text "P1" at 2578.74,1232.28 h31.5
  text "P2" at 2653.54,1232.28 h31.5
  text "R" at 2748.03,1232.28 h31.5
  text "MOTOR1" at 1795.28,1173.23 h31.5
  text "RAW" at 3405.51,1070.87 h31.5
  text "D" at 1389.76,996.06 h31.5
  text "U" at 1484.25,996.06 h31.5
  text "OUT1" at 263.78,700.79 h31.5
  text "+" at 519.68,629.92 h39.37
  text "OUT2" at 263.78,606.3 h31.5
  text "GND" at 263.78,480.31 h31.5
  text "POT" at 263.78,377.95 h31.5
  text "3.3V" at 263.78,279.53 h31.5
  text "Turnomatic" at 629.92,118.11 h59.06
  text "Michael Manansala + Nivaaz Kaur" at 649.61,70.87 h31.5
Mechanical 1:
  the board outline again, w7.87